# EAGLE board untitled (EAGLE 5.07)
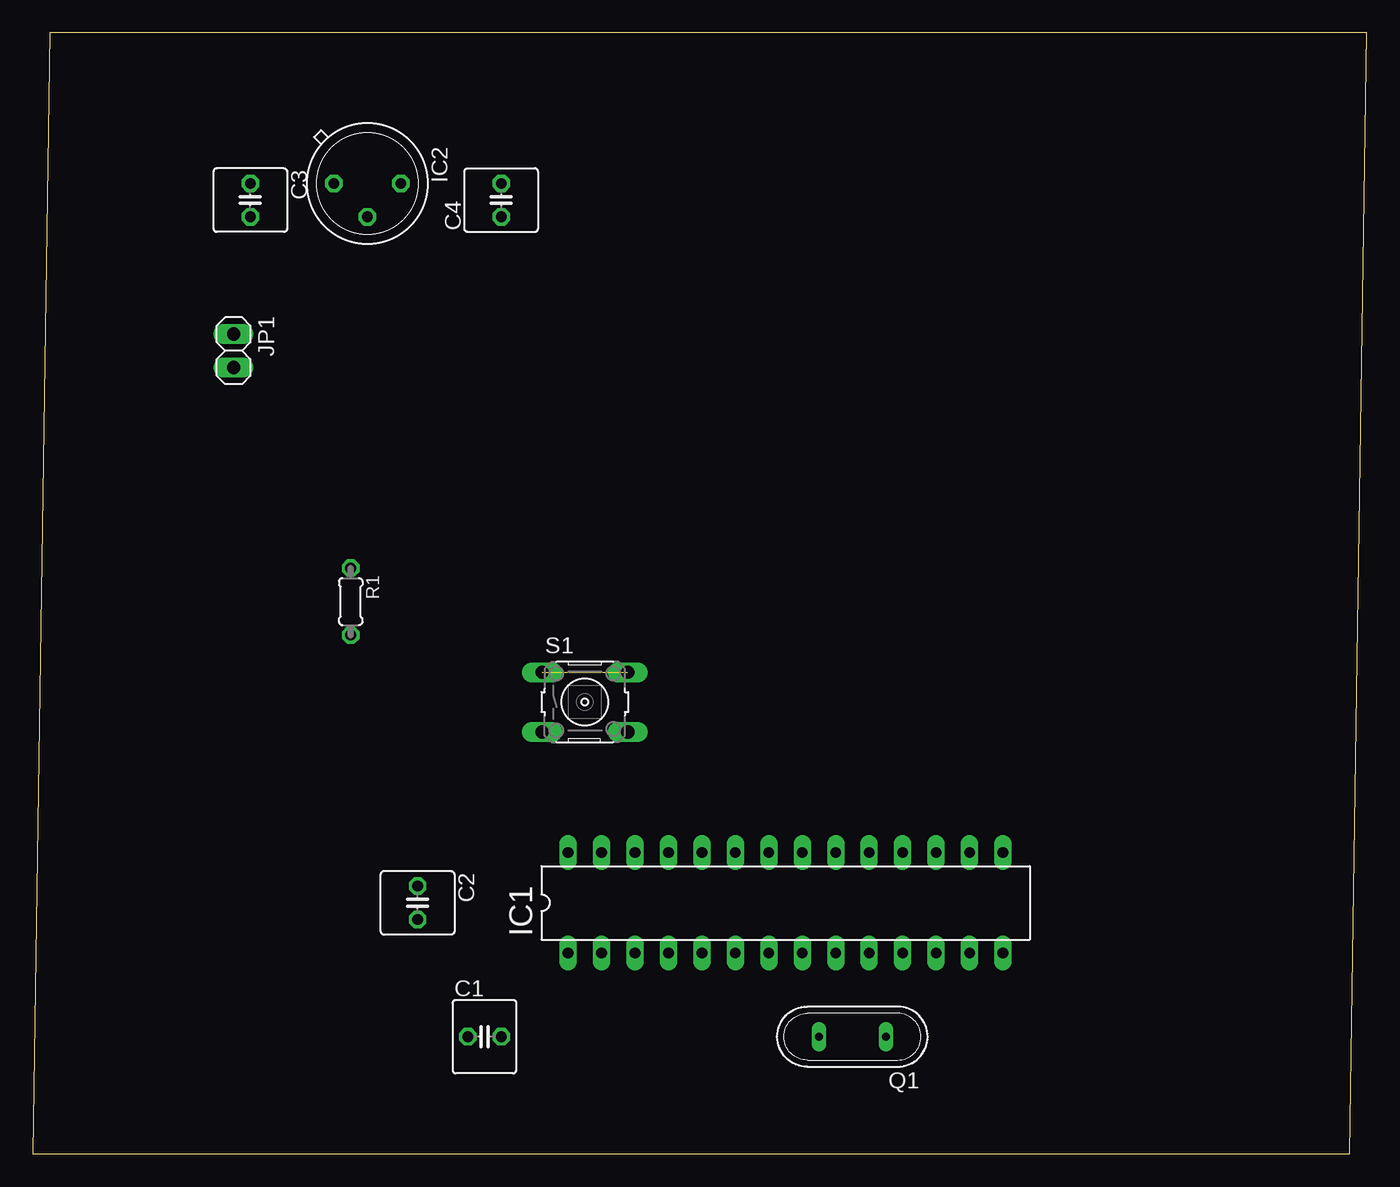
[diagram p0: board, top side]
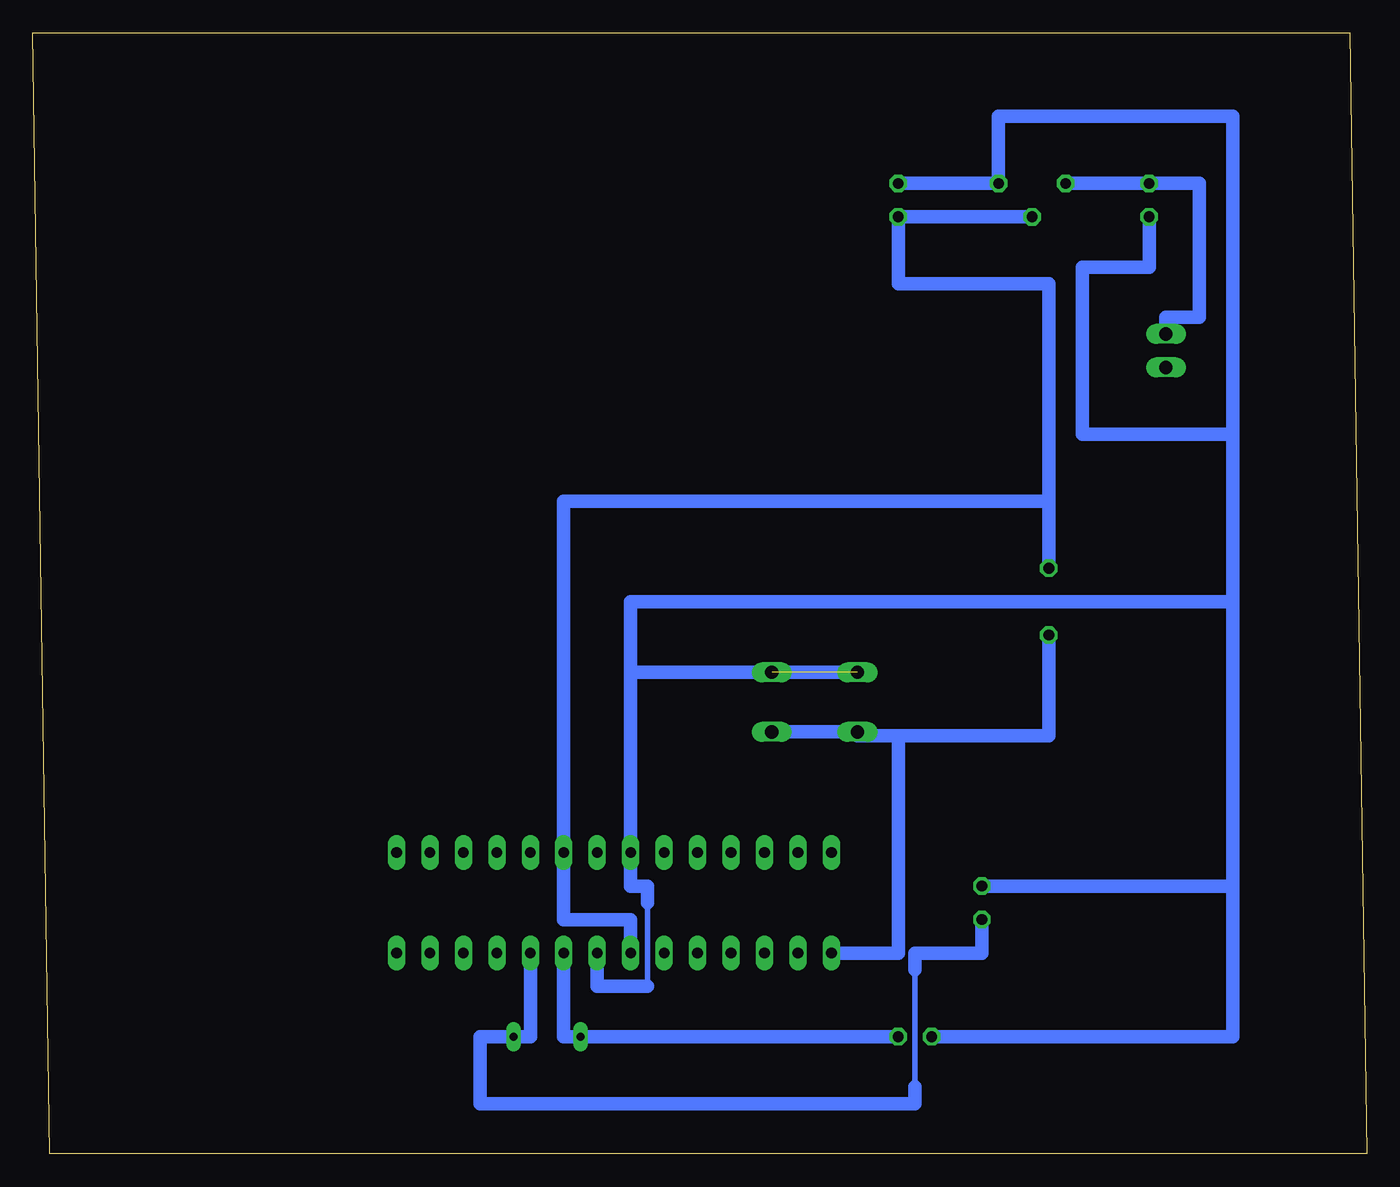
[diagram p1: board, bottom side, seen from below]

Size 101.27 x 85.08 mm. Coordinates in mm from the lower left corner, seen from the top.
Outline: 0,0 100,0 101.27,85.08 1.27,85.08 0,0
Copper layers (1*16): Top 0.035mm / dielectric 1.5mm / Bottom 0.035mm
Design rules "default": minimum track width 10mil, minimum drill 24mil, track to track 8mil, track to pad 8mil, pad to pad 8mil, via to via 8mil, smd to smd 8mil, copper to edge 40mil, drill to drill 8mil, minimum pad ring 10mil, minimum via ring 8mil, stop-mask expansion 4mil, vias tented up to drill 0mil, thermal gap 10mil

## Footprints (pad centres in the part's own frame; a part is rotated, then mirrored left to right if it is on the bottom)
C025-060X050 = drill 0.813 octagon: 1 -1.27,0; 2 1.27,0
DIL28-3 = drill 0.813 long: 1 -16.51,-3.81; 2 -13.97,-3.81; 3 -11.43,-3.81; 4 -8.89,-3.81; 5 -6.35,-3.81; 6 -3.81,-3.81; 7 -1.27,-3.81; 8 1.27,-3.81; 9 3.81,-3.81; 10 6.35,-3.81; 11 8.89,-3.81; 12 11.43,-3.81; 13 13.97,-3.81; 14 16.51,-3.81; 15 16.51,3.81; 16 13.97,3.81; 17 11.43,3.81; 18 8.89,3.81; 19 6.35,3.81; 20 3.81,3.81; 21 1.27,3.81; 22 -1.27,3.81; 23 -3.81,3.81; 24 -6.35,3.81; 25 -8.89,3.81; 26 -11.43,3.81; 27 -13.97,3.81; 28 -16.51,3.81
TO39 = drill 0.813 octagon: 1 0,-2.54; 2 2.54,0; 3 0,2.54
1X02 = drill 1.016 long: 1 -1.27,0; 2 1.27,0
QS = drill 0.61 long: 1 -2.54,0; 2 2.54,0
0204/5 = drill 0.813 octagon: 1 -2.54,0; 2 2.54,0
B3F-10XX = drill 1.016 long: 1 -3.251,2.261; 2 3.251,2.261; 3 -3.251,-2.261; 4 3.251,-2.261

## Placement (x,y rotation side)
C1  [C025-060X050]  34.29,8.89 0 top
C2  [C025-060X050]  29.21,19.05 270 top
C3  [C025-060X050]  16.51,72.39 270 top
C4  [C025-060X050]  35.56,72.39 90 top
IC1  MEGA8-P  [DIL28-3]  57.15,19.05 0 top
IC2  7805H  [TO39]  25.4,73.66 270 top
JP1  [1X02]  15.24,60.96 270 top
Q1  [QS]  62.23,8.89 180 top
R1  [0204/5]  24.13,41.91 270 top
S1  [B3F-10XX]  41.91,34.29 0 top

## Library data of the parts
C1-C4 = rcl
IC1 = atmel
IC2 = linear
JP1 = pinhead
Q1 = special
R1 = resistor
S1 = switch-omron

## Nets
GND: C1.1 C2.1 C3.2 C4.2 IC1.8 IC1.22 IC2.3 S1.1 S1.2
N$1: C3.1 IC2.1 JP1.1
N$3: C2.2 IC1.10 Q1.1
N$4: C1.2 IC1.9 Q1.2
N$5: IC1.1 R1.2 S1.3 S1.4
VCC: C4.1 IC1.7 IC1.20 IC2.2 R1.1

## Tracks (layer width: path | path; a pad name or v marks a point on that pad's centre or on a via)
GND  (1 unrouted)
  Bottom 0.406: 54.61,19.05 54.61,12.7
  Bottom 1.016: 10.16,41.91 10.16,54.61 | 10.16,54.61 10.16,78.74 27.94,78.74 IC2.3 C4.2 | 10.16,41.91 55.88,41.91 55.88,36.55 | 10.16,20.32 C2.1 | 10.16,20.32 10.16,41.91 | 10.16,20.32 10.16,8.89 C1.1 | IC1.8 58.42,12.7 54.61,12.7 | 54.61,19.05 54.61,20.32 55.88,20.32 IC1.22 55.88,35.56 55.88,36.55 | C3.2 16.51,67.31 21.59,67.31 21.59,54.61 10.16,54.61 | 55.88,36.55 S1.1
N$1
  Bottom 1.016: IC2.1 C3.1 12.7,73.66 12.7,63.5 15.24,63.5 JP1.1
N$3
  Bottom 0.406: 34.29,13.97 34.29,5.08
  Bottom 1.016: IC1.10 63.5,8.89 Q1.1 67.31,8.89 67.31,3.81 34.29,3.81 34.29,5.08 | C2.2 29.21,15.24 34.29,15.24 34.29,13.97
N$4
  Bottom 1.016: IC1.9 60.96,8.89 Q1.2 C1.2
N$5
  Bottom 1.016: R1.2 24.13,31.75 35.56,31.75 | 35.56,31.75 38.66,31.75 S1.3 S1.4 | IC1.1 35.56,15.24 35.56,31.75
VCC
  Bottom 1.016: IC2.2 C4.1 35.56,66.04 24.13,66.04 24.13,49.53 | IC1.7 55.88,17.78 60.96,17.78 IC1.20 60.96,49.53 24.13,49.53 | R1.1 24.13,49.53